# Altium PCB Lab_8_v3.PcbDoc
Units mil, origin at the board's own origin, x right, y up, seen from the top; angles counter-clockwise.
Board outline 3900 x 3900 mil, 2 copper layers (Top Layer, Bottom Layer); 30 components, 25 nets, 115 pads, 23 vias.
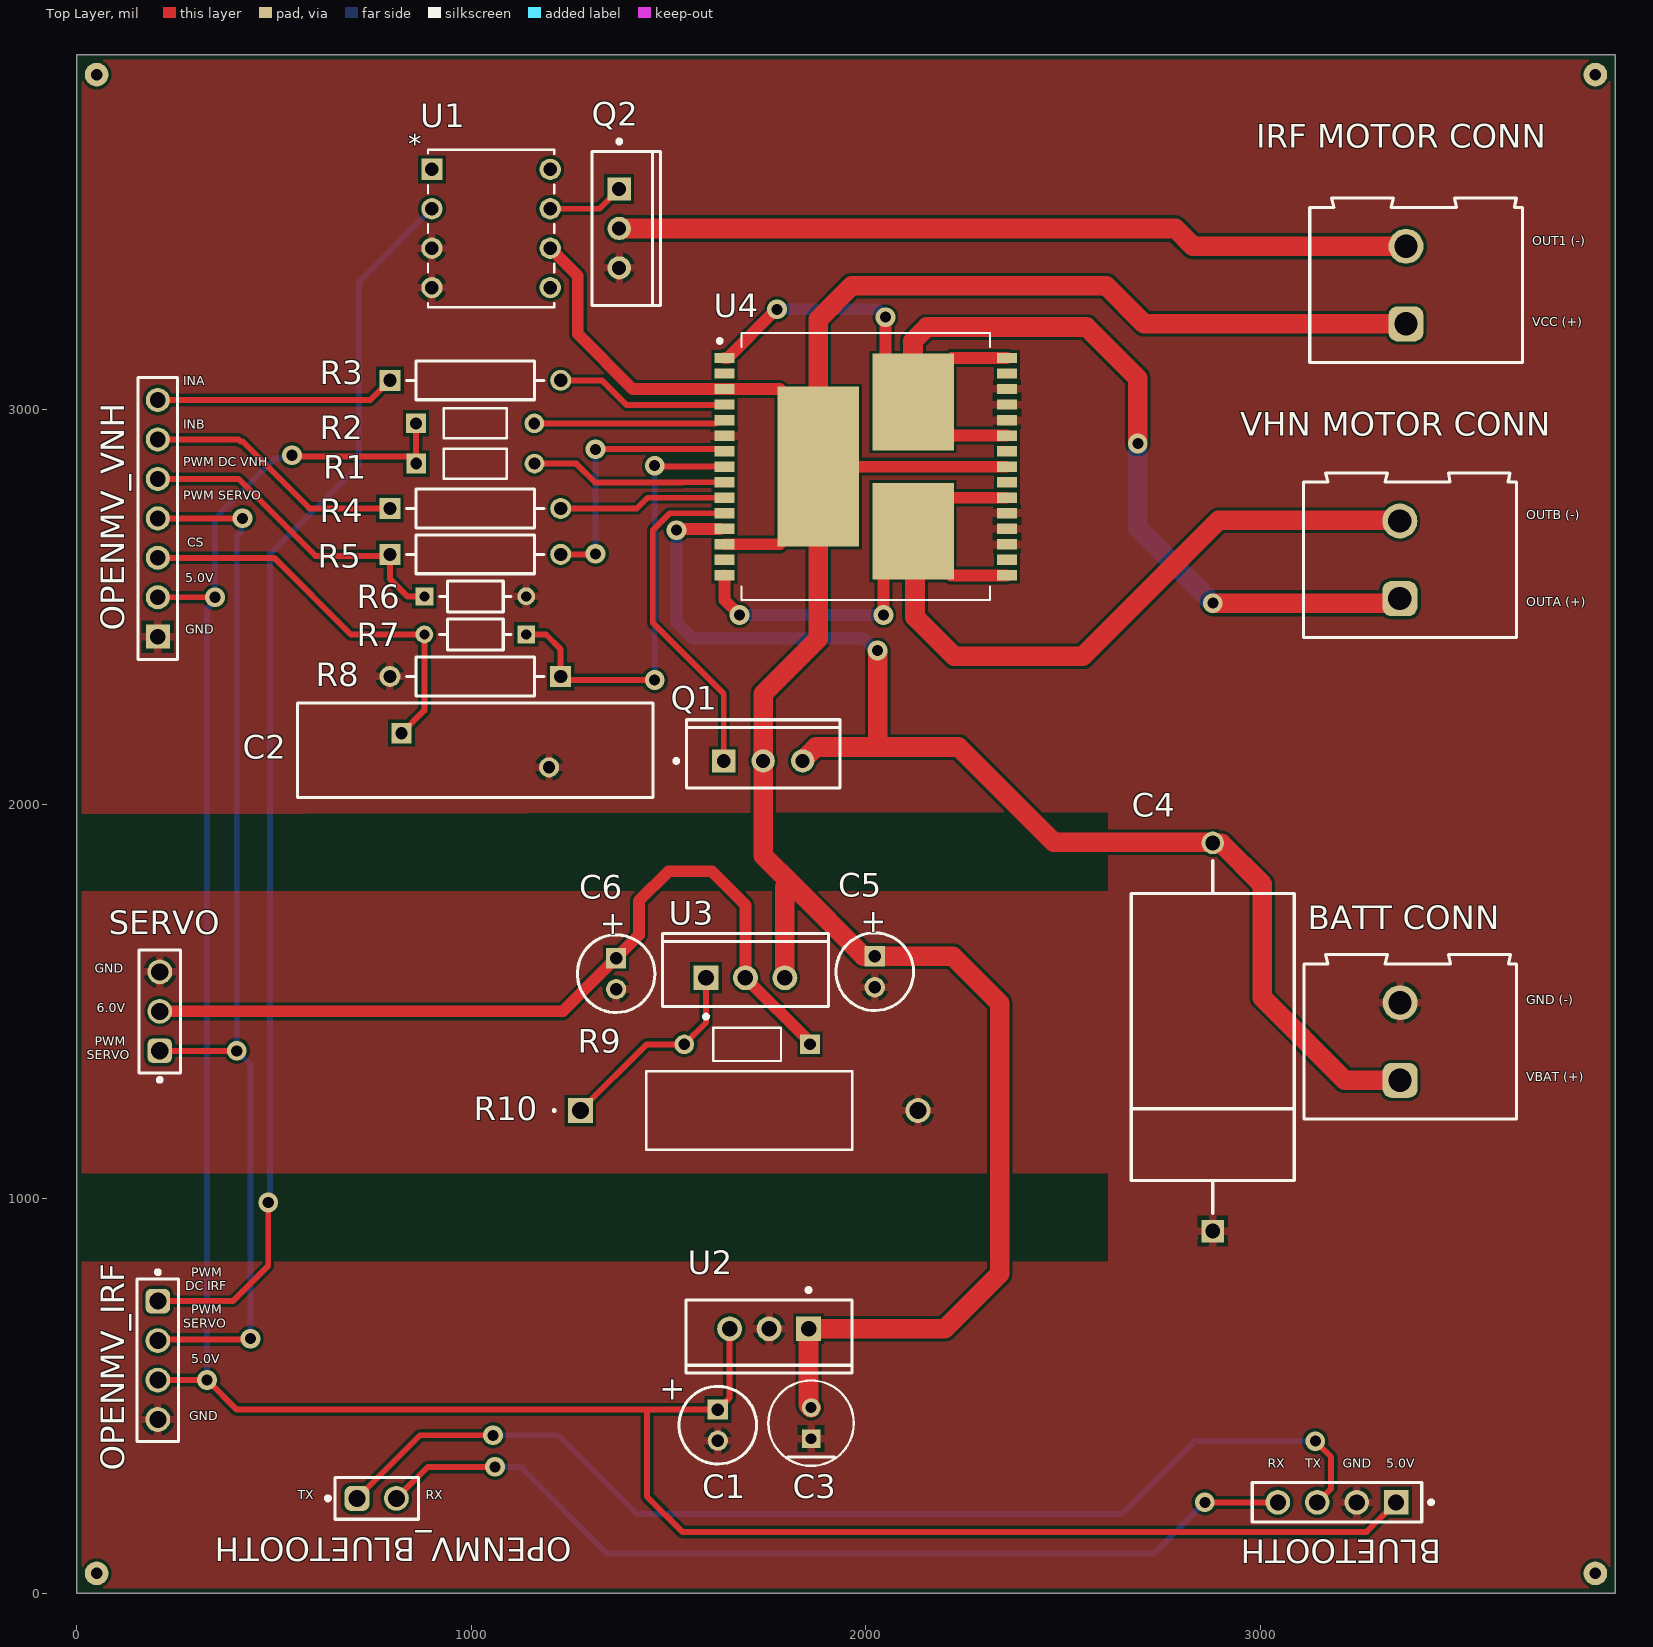
[diagram p0: Top Layer view]
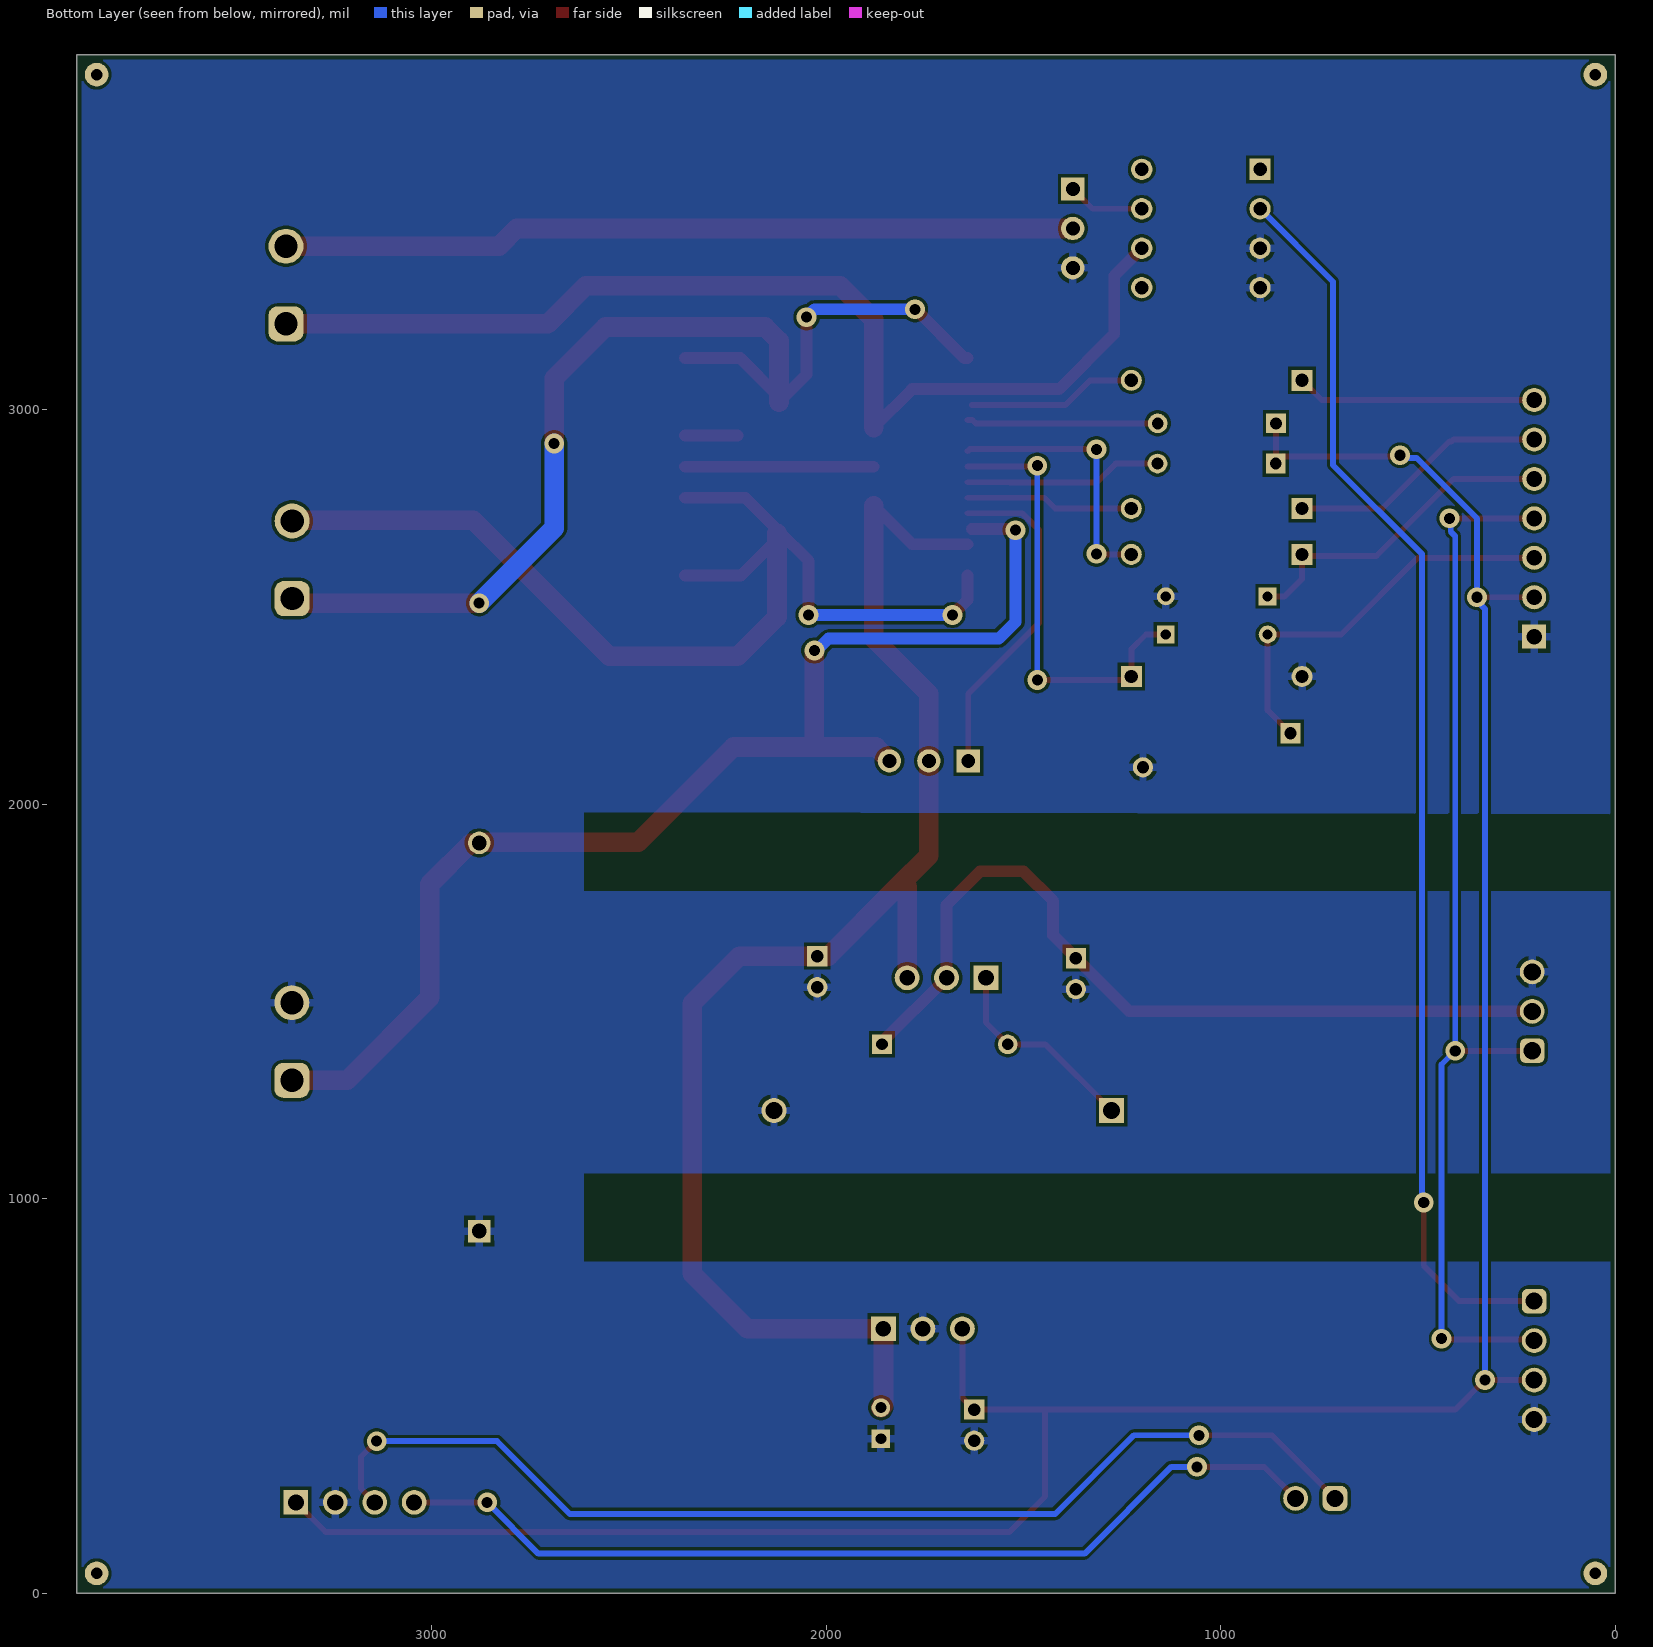
[diagram p1: Bottom Layer view, seen from below]
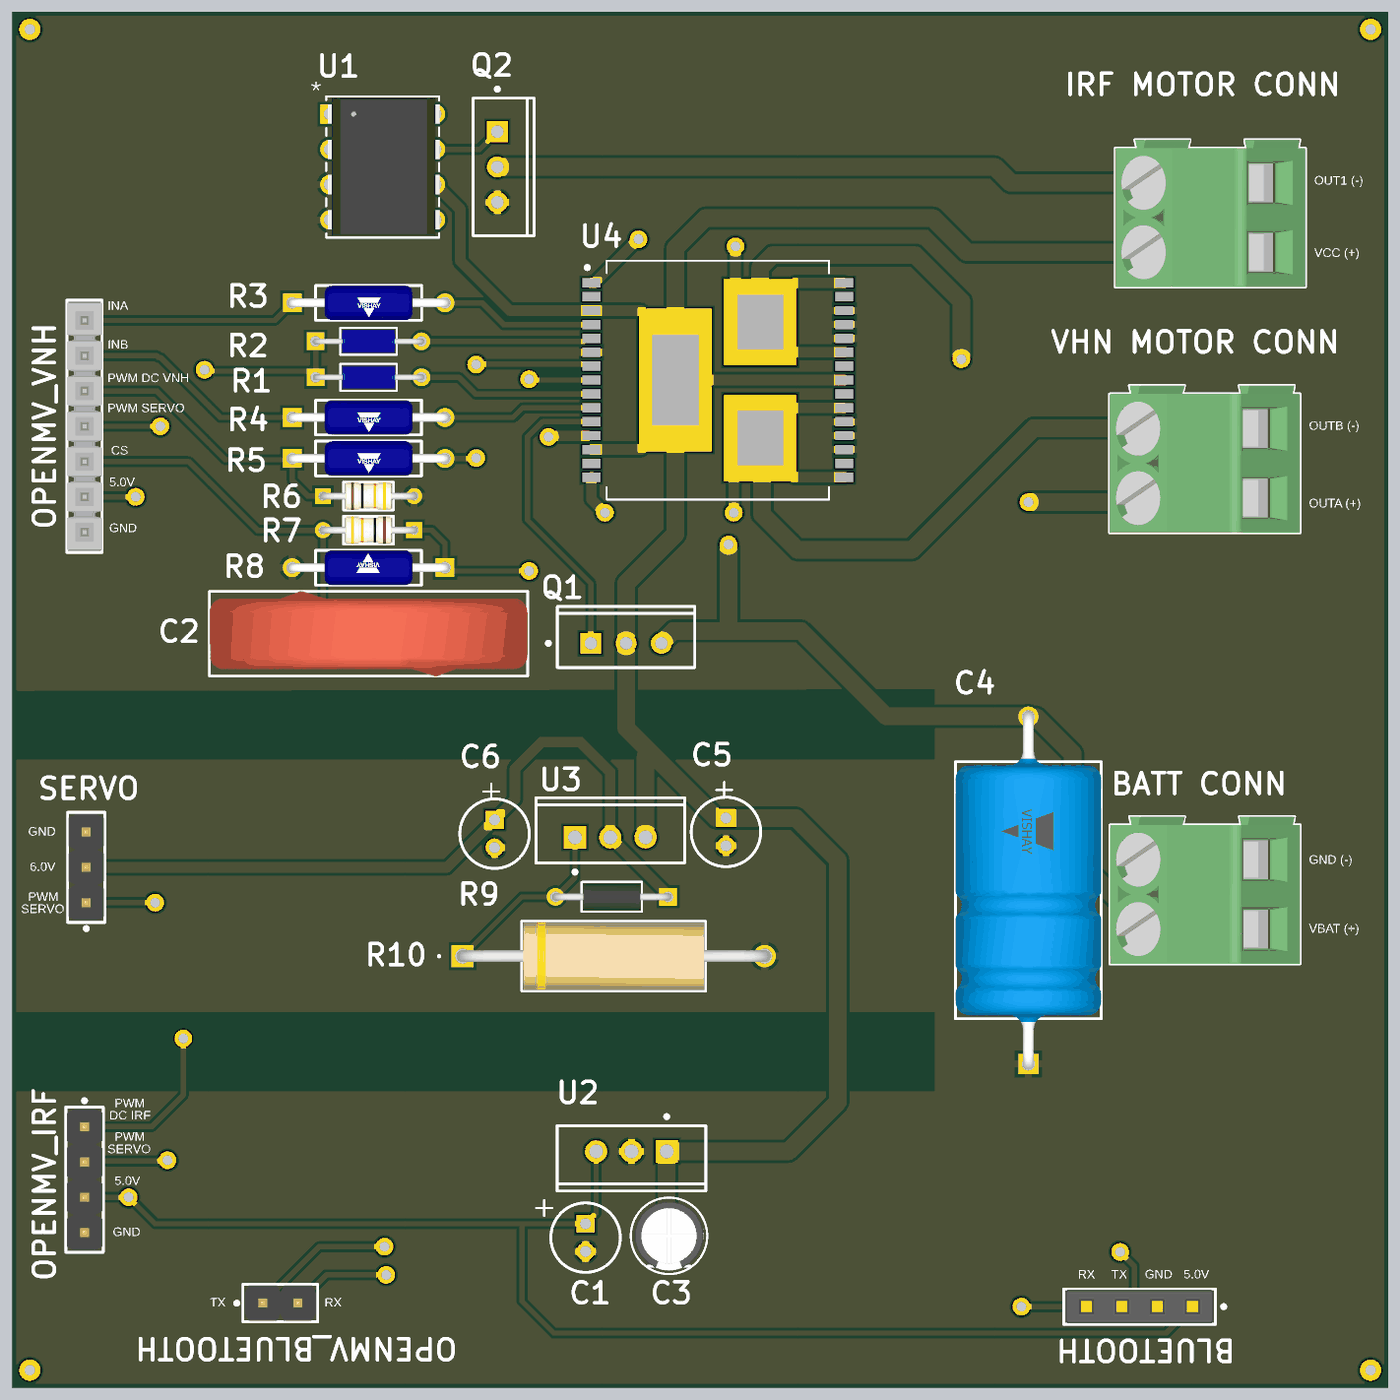
[diagram p2: 3D render of the assembled board from above, using the file's embedded part models]

## Layer stack, top to bottom
Top Solder: solder mask 0.4, Solder Resist, Dk 3.5
Top Layer: signal copper 1.4
Dielectric 1: dielectric 12.6, FR-4, Dk 4.8
Bottom Layer: signal copper 1.4
Bottom Solder: solder mask 0.4, Solder Resist, Dk 3.5

## Board outline
0,0 0,3900 3900,3900 3900,0

## Design rules (kind name [scope] priority, off if disabled: settings)
BoardOutlineClearance [All] p1: gap=11.81 ignorepadtopadclearanceinfootprint=FALSE except(15.75: Arc-SplitBarrior Arc-SplitContinuation Track-SplitBarrior Track-SplitContinuation SMDPad-SplitBarrior SMDPad-SplitContinuation THPad-SplitBarrior THPad-SplitContinuation Via-SplitBarrior Via-SplitContinuation Fill-SplitBarrior Fill-SplitContinuation Poly-SplitBarrior Poly-SplitContinuation Region-SplitBarrior Region-SplitContinuation Text-SplitBarrior Text-SplitContinuation)
Clearance "Clearance Different Nets" [All] p1: gap=7.87 ignorepadtopadclearanceinfootprint=FALSE except(3.5: Arc-Arc Arc-Track Arc-SMDPad Track-Track Track-SMDPad; 5: SMDPad-SMDPad SMDPad-Via THPad-Via Via-Via; 10: Arc-Via Arc-Text Track-Via Track-Text SMDPad-Text THPad-Text Via-Text Fill-Text Poly-Text Region-Text Text-Text; 19.68: THPad-THPad Via-Hole)
Clearance "Clearance Same Nets" [All] p2: gap=7.87 ignorepadtopadclearanceinfootprint=FALSE except(3.5: Arc-Arc Arc-Track Arc-SMDPad Track-Track Track-SMDPad SMDPad-SMDPad; 5: SMDPad-Via THPad-Via; 10: Arc-Via Arc-Text Track-Via Track-Text SMDPad-Text THPad-Text Via-Via Via-Text Fill-Text Poly-Text Region-Text Text-Text)
Clearance "Clearance Bottom Layer" [OnLayer('Bottom Layer')] p3: gap=8 ignorepadtopadclearanceinfootprint=TRUE except(10: Arc-Text Track-Text SMDPad-Text THPad-Text Via-Text Fill-Text Poly-Text Region-Text Text-Text)
Clearance "Clearance Top Layer" [OnLayer('Top Layer')] p4: gap=8 ignorepadtopadclearanceinfootprint=TRUE except(10: Arc-Text Track-Text SMDPad-Text THPad-Text Via-Text Fill-Text Poly-Text Region-Text Text-Text)
HoleSize [All] p1: absolutevalues=TRUE maxlimit=248.03 minlimit=7.87 maxpercent=80.000 minpercent=20.000
MinimumAnnularRing [All] p1: minimumring=5.12
MinimumSolderMaskSliver [All] p1: minsoldermaskwidth=3.94
PolygonConnect PolygonConnect_1 [All] p1: thpad.connectstyle=Relief thpad.reliefconductorwidth=20 thpad.reliefentries=4 thpad.polygonreliefangle="90 Angle" thpad.airgapwidth=10 smdpad.connectstyle=Relief smdpad.reliefconductorwidth=20 smdpad.reliefentries=4 smdpad.polygonreliefangle="90 Angle" smdpad.airgapwidth=10 via.connectstyle=Direct via.reliefconductorwidth=20 via.reliefentries=4 via.polygonreliefangle="90 Angle" via.airgapwidth=10
RoutingCorners [All] p1: cornerstyle=Round minsetback=100 maxsetback=100
RoutingVias [All] p1: holewidth=19.68 width=39.37 viastyle="Through Hole" minholewidth=7.87 minwidth=13.78 maxholewidth=39.37 maxwidth=78.74
SilkToSilkClearance [All] p1: silktosilkclearance=3.94
SilkToSolderMaskClearance [IsPad] p1: minsilkscreentomaskgap=3.94 clearancetoexposedcopper=TRUE
SolderMaskExpansion [All] p1: expansion=4 istentingtop=FALSE
SupplyNets "Schematic Supply Nets" [InNet('GND')] p1: voltage=0.000
Width [All] p1: maxlimit=100 minlimit=3.5 preferedwidth=15
25 further rules are at their usual default settings.

## Components (designator, comment, footprint, x,y, rotation, side; value= is the part's Value field where it differs from the comment)
"BATT CONN" "691211720002" 691211720002 3380.59,1398.42 r90 top
BLUETOOTH "SSW-104-02-G-S" FP-SSW-104-02-G-S-MFG 3195,230 r180 top
C1 "ECA1HM220" CAPPR55-200-1100X500X1200 1625,425.63 r270 top value=22µF
C2 "33nF" FP-565R30GASS33-MFG 1010,2137.01 r0 top
C3 "EEU-EB1JR47S" FP-RAD-TH-D_5_0_5-L_11_1-MFG 1861.49,430.67 r90 top value=470nF
C4 "MAL202136471E3" FP-MAL202136471E3-MFG 2880,1410 r90 top value=470µF
C5 "ECA1HM100" CAPPR55-200-1100X500X1200 2022.91,1575.43 r270 top value=10µF
C6 "ECA1HM100" CAPPR55-200-1100X500X1200 1367.09,1570.42 r270 top value=10µF
"IRF MOTOR CONN" "691211720002" 691211720002 3395.59,3316.57 r90 top
OPENMV_BLUETOOTH "61300211121" 61300211121 760,240 r0 top
OPENMV_IRF "61300411121" 61300411121 205,590 r270 top
OPENMV_VNH "TSW-107-05-G-S" SMTC-TSW-107-05-X-S 205,2425 r90 top
Q1 "IRF3205PBF" INF-PG-TO-220AB 1740,2110 r90 top
Q2 "IRF3205PBF" INF-PG-TO-220AB 1375,3460 r0 top
R1 "RLR05C4701GRB14" ERL05_VIS 860.14,2863.85 r0 top value=4.7k
R2 "RLR05C4701GRB14" ERL05_VIS 859.69,2965.85 r0 top value=4.7k
R3 "1k" FP-RLR07-MFG 1010.12,3075 r0 top
R4 "1k" FP-RLR07-MFG 1010,2750 r0 top
R5 "1k" FP-RLR07-MFG 1010,2633.7 r0 top
R6 "CF18JT10K0" FP-CF18-MFG 1010,2527.24 r0 top value=10k
R7 "CF18JT10K0" FP-CF18-MFG 1010,2430.63 r180 top value=10k
R8 "1k" FP-RLR07-MFG 1010,2324.17 r180 top
R9 "SFR16S0001210FR500" SFR16S_VIS 1858.79,1391.33 r180 top value=121
R10 "AC03000004700JAC00" RES_AC03_VIS 1276.55,1223.43 r0 top value=470
SERVO "61300311121" 61300311121 210,1475 r90 top
U1 "MAX4427CPA+" 21-0043_P8+2_MXM 900,3610 r0 top
U2 "LM2940CT-5.0/NOPB" NDE0003A 1755,670 r180 top
U3 "LM1086CT-ADJ/NOPB" NDE0003A 1695,1560 r0 top
U4 "VNH5019ATR-E" IC_VNH5019ATR-E 1999.92,2856.02 r0 top
"VHN MOTOR CONN" "691211720002" 691211720002 3380,2620 r90 top

## Footprints (in the part's own frame and the unit in brackets; to place one, negate y for a bottom-side part, rotate by r counter-clockwise, add the part's x,y. Pads: shape width x height; smd on the part's side, far side on the other; paste and mask are expansions set on the pad)
21-0043_P8+2_MXM [mil]
  rect 54x54 / inner round 60 / far side rect 54x54 hole 34 paste-99999 mask+0: 1(0,0)
  round 54 / inner round 60 / far side round 54 hole 34 paste-99999 mask+0: 2(0,-100) 3(0,-200) 4(0,-300) 5(300,-300) 6(300,-200) 7(300,-100) 8(300,0)
  silkscreen extent -10,-350 310,50, body extent -6,-345 311,45, height 186
61300211121 [mm] "Pin Header, pitch 2.54 mm, THT, Vertical, single row, 2p"
  rrect50% 1.6x1.6 hole 1.1: 1(-1.27,0)
  round 1.6 hole 1.1: 2(1.27,0)
  silkscreen extent -3.26,-1.35 2.69,1.35, body extent -2.54,-1.27 2.54,1.27, height 8.57
61300311121 [mm] "Pin Header, pitch 2.54 mm, THT, Vertical, single row, 3p"
  rrect50% 1.6x1.6 hole 1.1: 1(-2.54,0)
  round 1.6 hole 1.1: 2(0,0) 3(2.54,0)
  silkscreen extent -4.53,-1.35 3.96,1.35, body extent -3.81,-1.27 3.81,1.27, height 8.57
61300411121 [mm] "Pin Header, pitch 2.54 mm, THT, Vertical, single row, 4p"
  rrect50% 1.6x1.6 hole 1.1: 1(-3.81,0)
  round 1.6 hole 1.1: 2(-1.27,0) 3(1.27,0) 4(3.81,0)
  silkscreen extent -5.8,-1.35 5.23,1.35, body extent -5.08,-1.27 5.08,1.27, height 8.57
691211720002 [mm] "5,00mm - modular - green -45¡ã entry with rising cage clamp - 02p"
  rrect50% 2.25x2.25 hole 1.5: 1(-2.5,0.65)
  round 2.25 hole 1.5: 2(2.5,0.65)
  silkscreen extent -5,-6.85 5.6,6.85, body extent -5,-6.85 5.6,6.85, height 15.72
CAPPR55-200-1100X500X1200 [mm] "THD, 2-Leads, Dia 5mm, Pin Spacing 2mm"
  rect 1.3x1.3 hole 0.8: 1(-1,0)
  round 1.3 hole 0.8: 2(1,0)
  silkscreen extent -2.5,-2.5 2.5,2.5, body extent -2.5,-2.5 2.45,2.5, height 12
ERL05_VIS [mil]
  rect 50x50 / inner round 60 / far side rect 50x50 hole 30 paste-99999 mask+0: 1(0,0)
  round 50 / inner round 60 / far side round 50 hole 30 paste-99999 mask+0: 2(300,0)
  silkscreen extent 70,-38 230,38, body extent -8,-33 308,33, height 66
FP-565R30GASS33-MFG [mm]
  rect 1.3x1.3 hole 0.8 paste-2539.97 mask+0: 1(-4.75,1.1)
  round 1.3 hole 0.8 paste-2539.97 mask+0: 2(4.75,-1.1)
  silkscreen extent -11.45,-3.05 11.45,3.05, body extent -11.55,-3.15 11.55,3.15, height 0.25
FP-CF18-MFG [mm]
  rect 1.15x1.15 hole 0.65 paste-2539.97 mask+0: 1(-3.28,0)
  round 1.15 hole 0.65 paste-2539.97 mask+0: 2(3.28,0)
  silkscreen extent -2.3,-1 2.3,1, body extent -3.96,-1.1 3.96,1.1, height 0.25
FP-MAL202136471E3-MFG [mm]
  rect 1.45x1.45 hole 0.95 paste-2539.97 mask+0: 1(-12.5,0)
  round 1.45 hole 0.95 paste-2539.97 mask+0: 2(12.5,0)
  silkscreen extent -11.37,-5.25 11.37,5.25, body extent -13.33,-5.35 13.33,5.35, height 0.25
FP-RAD-TH-D_5_0_5-L_11_1-MFG [mm]
  rect 1.2x1.2 hole 0.7 paste-2539.97 mask+0: 1(-1,0)
  round 1.2 hole 0.7 paste-2539.97 mask+0: 2(1,0)
  silkscreen extent -2.75,-2.75 2.75,2.75, body extent -2.85,-2.85 2.85,2.85, height 0.25
FP-RLR07-MFG [mm]
  rect 1.35x1.35 hole 0.85 paste-2539.97 mask+0: 1(-5.5,0)
  round 1.35 hole 0.85 paste-2539.97 mask+0: 2(5.5,0)
  silkscreen extent -4.43,-1.25 4.43,1.25, body extent -6.27,-1.35 6.27,1.35, height 0.25
FP-SSW-104-02-G-S-MFG [mm]
  rect 1.59x1.59 hole 1.04 paste-2539.97 mask+0: 1(-3.81,0)
  round 1.59 hole 1.04 paste-2539.97 mask+0: 2(-1.27,0) 3(1.27,0) 4(3.81,0)
  silkscreen extent -6.19,-1.27 5.46,1.27, body extent -5.56,-1.37 5.56,1.37, height 0.25
IC_VNH5019ATR-E [mm]
  rect 1.3x0.665 smd: 1(-9.1,7) 2(-9.1,6) 3(-9.1,5) 4(-9.1,4) 5(-9.1,3) 6(-9.1,2) 7(-9.1,1) 8(-9.1,0) 9(-9.1,-1) 10(-9.1,-2) 11(-9.1,-3) 12(-9.1,-4) 13(-9.1,-5) 14(-9.1,-6) 15(-9.1,-7) 16(9.1,-7) 17(9.1,-6) 18(9.1,-5) 19(9.1,-4) 20(9.1,-3) 21(9.1,-2) 22(9.1,-1) 23(9.1,0) 24(9.1,1) 25(9.1,2) 26(9.1,3) 27(9.1,4) 28(9.1,5) 29(9.1,6) 30(9.1,7)
  rect 5.25x10.3 smd paste-6: HS1(-3.05,0)
  rect 5.25x6.23 smd paste-4: HS2(3.05,4.165) HS3(3.05,-4.165)
  silkscreen extent -9.5,-8.6 8,8.6
INF-PG-TO-220AB [mm] "FM, 3-Leads, Body 9.9x4.4mm, Pitch 2.54mm"
  rect 1.5x1.5 hole 0.9: 1(0,2.54)
  round 1.5 hole 0.9: 2(0,0) 3(0,-2.54)
  silkscreen extent -1.75,-4.95 2.65,5.72, body extent -1.75,-4.95 2.65,4.95, height 20.2
NDE0003A [mm] "FM, 3-Leads, Body 10.7x4.7mm, Pitch 2.54mm"
  rect 1.6x1.6 hole 1: 1(-2.54,0)
  round 1.6 hole 1: 2(0,0) 3(2.54,0)
  silkscreen extent -5.35,-2.62 5.35,2.85, body extent -5.4,-1.9 5.4,2.9, height 19.4
RES_AC03_VIS [mil]
  rect 63x63 / inner round 60 / far side rect 63x63 hole 43 paste-99999 mask+0: 1(0,0)
  round 63 / inner round 60 / far side round 63 hole 43 paste-99999 mask+0: 2(856,0)
  silkscreen extent -69,-100 689,100, body extent -16,-95 873,95, height 189
SFR16S_VIS [mil]
  rect 49.69x49.69 / inner round 60 / far side rect 49.69x49.69 hole 30 paste-99999 mask+0: 1(0,0)
  round 49.69 / inner round 60 / far side round 49.69 hole 30 paste-99999 mask+0: 2(318.9,0)
  silkscreen extent 74,-42 245,42, body extent -10,-37 329,37, height 75
SMTC-TSW-107-05-X-S [mm] ".025 SQ Post Terminal Strip Assembly, 1x7 Pins, Vertical, 2.54mm Pitch, Male"
  rect 1.55x1.55 hole 1.02: 1(0,0)
  round 1.55 hole 1.02: 2(2.54,0) 3(5.08,0) 4(7.62,0) 5(10.16,0) 6(12.7,0) 7(15.24,0)
  silkscreen extent -1.46,-1.27 16.7,1.27, body extent -1.27,-1.27 16.51,1.27, height 5.21

## Part data
"BATT CONN" "IRF MOTOR CONN": library part CMP-1502-02524-2, Color=Green, Current=10A, Max Operating Temperature=105°C, Min Operating Temperature=-40°C, Voltage=300V, Connector Type="PCB, Terminal Block", Contact Material=Brass, Contact Plating=Tin, Height=15.5mm, Housing Material=Nylon, Lead Pitch=5mm, Length=13.7mm, Mount="Through Hole", NexarPartId=8917714, Number of Contacts=2, Number of Levels=1, Number of Pins=2, Number of Positions Per Level=2, Packaging=Box, Pitch=5.0038mm, Plating="Brass, Steel", REACH SVHC=Unknown, RoHS=Compliant, Stripping Length=-7mm, Termination=Screw, Width=10mm, Wire Gauge (Max)=24AWG, Wire Gauge (Min)=12AWG, Wire/Cable Gauge=12AWG
BLUETOOTH: library part CMP-002-00079-1, "Board Connector, 4 Contact(s), 1 Row(s), Female, Straight, 0.1 inch Pitch, Solder Terminal, Locking, Socket", Flammability Rating="UL94 V-0", Manufacturer Series=SSW-1, Additional Feature="TIGER BUY CONTACT", Body Breadth=0.095inch, Body Length=0.42inch, Body/Shell Style=SOCKET, Connector Type="BOARD CONNECTOR", Contact Finish - Mating="GOLD (20) OVER NICKEL (50)", Contact Finish - Termination="Gold (Au) - with Nickel (Ni) barrier", Contact Gender=Female, Contact Material=Bronze, Contact Pattern=RECTANGULAR, Contact Style="SQ PIN-SKT", DIN Conformance=No, Filter Feature=No, IEC Conformance=No, Insulation Material=Polymer, JESD-609 Code=e4, Mating Contact Pitch=0.1inch, Mating Information="MULTIPLE MATING PARTS AVAILABLE", MIL Conformance=No, Mixed Contacts=No, Mounting Option 1=LOCKING, Mounting Style=STRAIGHT, Mounting Technology=Board, Number Of Connectors=1, Number of Contacts=4, Number Of PCB Rows=1, Number of Rows Loaded=1, Option="General Purpose", PCB Contact Pattern=RECTANGULAR, Plating Thickness=20uin, Reach SVHC Compliant=Yes, Reference Standard=UL, Reliability=COMMERCIAL, RoHS Compliant=Yes, Terminal Pitch=2.54mm, Termination=Solder
C1: library part CMP-001-00027-7, "Aluminum Electrolytic Capacitor, 22 uF, +/- 20%, 50 V, -40 to 85 degC, 2-Pin THD, RoHS, Bulk", Capacitor Type=Electrolytic, Case/Package=Radial, Manufacturer=Panasonic, Max Operating Temperature=85°C, Min Operating Temperature=-40°C, Package Description="2-Pin Radial Lead, Dia 5 mm, Height 12 mm", Package Quantity=200, Package Reference=CAPPR55-200-1100X500X1200, Ripple Current=100mA, Tolerance=20%, Voltage Rating=50V, Datasheet URL=https://industrial.panasonic.com/cdbs/www-data/pdf/RDF0000/ABA0000C1218.pdf, Datasheet Version="Rev. 05, 10/2016", Diameter=5mm, Lead Pitch=2mm, Manufacturer URL=http://www.panasonic.com/, Mounting Technology=TH, Packaging=Bulk, Pins=2, Ripple Current (AC)=100mA, RoHS Compliant=True
C2: library part CMP-00030-41968055-1, "565R30GASS33 33nF 3 kV dc Ceramic Single Layer Capacitor; Z5U Dielectric Radial 565R Series", Case/Package=Radial, Dielectric=Z5U, Max Operating Temperature=105°C, Min Operating Temperature=-25°C, Tolerance=20%, Voltage=3kV, Capacitance=33nF, Composition=Ceramic, Depth=6.1mm, Diameter=22.9mm, Height=22.9mm, Lead Diameter=640µm, Lead Free="Lead Free", Lead Pitch=9.52mm, Material=Ceramic, Mount=Radial, NexarPartId=41968055, Packaging=Bulk, RoHS=Compliant, Schedule B=8532230060, Termination=Radial, Voltage Rating=3kV, Voltage Rating (DC)=3kV
C3: library part CMP-001-00093-1, "Aluminum Electrolytic Capacitor, Polarized, Aluminum (wet), 63V, 20% +Tol, 20% -Tol, 0.47uF, Through Hole Mount", Capacitor Type=Aluminium, Leakage Current=3uA, Manufacturer Series=EB, Max Operating Temperature=105°C, Min Operating Temperature=-40°C, Package Shape=Cylindrical, Package Style=RadialMeter, Rated DC Voltage (URdc)=63V, Ripple Current=4.5mA, Tolerance  (fill in as +-)=20%, Diameter=5mm, Dielectric Material=Aluminium, JESD-609 Code=e3, Length=11mm, Mounting Technology="Through Hole", Packaging=Bulk, Pins=2, Polarity=Polarized, Reach SVHC Compliant=Yes, RoHS Compliant=Yes, Series=EEU-EB, Tan Delta=0.12, Terminal Finish=Tin, Terminal Pitch=2mm, Termination=Wire, Tolerance (fill in as +-)=20%
C4: library part CMP-001-00083-2, "Aluminum Electrolytic Capacitor, Polarized, Aluminum (wet), 25V, 20% +Tol, 20% -Tol, 470uF, Through Hole Mount", Capacitor Type=Aluminium, ESR (Equivalent Series Resistance)=480mR, Leakage Current=28uA, Max Operating Temperature=85°C, Min Operating Temperature=-40°C, Package Shape=Tubular, Package Style=AxialMeter, Rated DC Voltage (URdc)=25V, Ripple Current=450mA, Tolerance  (fill in as +-)=20%, Diameter=10mm, Dielectric Material=Aluminium, JESD-609 Code=e3, Length=18mm, Mounting Technology="Through Hole", Packaging="Ammo Pack", Pins=2, Polarity=Polarized, Reach SVHC Compliant=Yes, RoHS Compliant=Yes, Tan Delta=0.14, Terminal Finish=Tin, Termination=Wire, Tolerance (fill in as +-)=20%
C5 C6: library part CMP-001-00025-7, "Aluminum Electrolytic Capacitor, 10 uF, +/- 20%, 50 V, -40 to 85 degC, 2-Pin THD, RoHS, Bulk", Capacitor Type=Electrolytic, Case/Package=Radial, Manufacturer=Panasonic, Max Operating Temperature=85°C, Min Operating Temperature=-40°C, Package Description="2-Pin Radial Lead, Dia 5 mm, Height 12 mm", Package Quantity=200, Package Reference=CAPPR55-200-1100X500X1200, Ripple Current=65mA, Tolerance=20%, Voltage Rating=50V, Datasheet URL=https://industrial.panasonic.com/cdbs/www-data/pdf/RDF0000/ABA0000C1218.pdf, Datasheet Version="Rev. 05, 10/2016", Diameter=5mm, Lead Pitch=2mm, Manufacturer URL=http://www.panasonic.com/, Mounting Technology=TH, Packaging=Bulk, Pins=2, Ripple Current (AC)=65mA, RoHS Compliant=True
OPENMV_BLUETOOTH: library part CMP-002-00073-1, "Board Connector, 2 Contact(s), 1 Row(s), Male, Straight, 0.1 inch Pitch, Solder Terminal, Locking, Black Insulator, Plug", Contact Resistance=20mR, Dielectric Withstanding Voltage (AC)=500V, Flammability Rating="UL94 V-0", Insulation Color=Black, Insulation Resistance=1GR, Max Operating Temperature=125°C, Min Operating Temperature=-40°C, Rated Current (Signal)=3A, Body Breadth=0.1inch, Body Depth=0.1inch, Body Length=0.2inch, Body/Shell Style=PLUG, Connector Type="BOARD CONNECTOR", Contact Finish - Mating=GOLD, Contact Finish - Termination="Gold (Au) - with Nickel (Ni) barrier", Contact Gender=Male, Contact Material="Copper Alloy", Contact Pattern=RECTANGULAR, Contact Style="SQ PIN-SKT", DIN Conformance=No, Filter Feature=No, IEC Conformance=No, Insulation Material=Polybutylene, JESD-609 Code=e4, Mating Contact Pitch=0.1inch, MIL Conformance=No, Mixed Contacts=No, Mounting Option 1=LOCKING, Mounting Style=STRAIGHT, Mounting Technology=Board, Number Of Connectors=1, Number of Contacts=2, Number of Rows Loaded=1, Option="General Purpose", PCB Contact Pattern=RECTANGULAR, Reach SVHC Compliant=Yes, Reference Standard=UL, Reliability=COMMERCIAL, RoHS Compliant=Yes, Terminal Length=0.118inch, Terminal Pitch=2.54mm, Termination=Solder
OPENMV_IRF: library part CMP-00009-2, "Board Connector, 4 Contact(s), 1 Row(s), Male, Straight, 0.1 inch Pitch, Solder Terminal, Locking, Black Insulator, Plug", Contact Resistance=20mR, Dielectric Withstanding Voltage (AC)=500V, Insulation Color=Black, Insulation Resistance=1GR, Max Operating Temperature=125°C, Min Operating Temperature=-40°C, Rated Current (Signal)=3A, Body Breadth=0.1inch, Body Depth=0.1inch, Body Length=0.4inch, Body/Shell Style=PLUG, Connector Type="BOARD CONNECTOR", Contact Finish - Mating=GOLD, Contact Finish - Termination="Gold (Au) - with Nickel (Ni) barrier", Contact Gender=Male, Contact Material="Copper Alloy", Contact Pattern=RECTANGULAR, Contact Style="SQ PIN-SKT", Insulation Material=Polybutylene, JESD-609 Code=e4, Mating Contact Pitch=0.1inch, Mounting Option 1=LOCKING, Mounting Style=STRAIGHT, Mounting Technology=Board, Number Of Connectors=1, Number of Contacts=4, Number of Rows Loaded=1, PCB Contact Pattern=RECTANGULAR, Reach SVHC Compliant=Yes, Reference Standard=UL, Reliability=COMMERCIAL, RoHS Compliant=Yes, Terminal Length=0.118inch, Terminal Pitch=2.54mm, Termination=Solder
OPENMV_VNH: library part CMP-002-00080-1, "Board Connector, 7 Contact(s), 1 Row(s), Male, Straight, 0.1 inch Pitch, Solder Terminal, Black Insulator", Flammability Rating="UL94 V-0", Insulation Color=Black, Additional Feature=E.L.P., Body Breadth=0.1inch, Body Depth=0.1inch, Connector Type="BOARD CONNECTOR", Contact Finish - Mating="GOLD (10) OVER NICKEL (50)", Contact Finish - Termination="Gold (Au) - with Nickel (Ni) barrier", Contact Gender=Male, Contact Material=Bronze, Contact Pattern=RECTANGULAR, Contact Style="SQ PIN-SKT", DIN Conformance=No, Filter Feature=No, IEC Conformance=No, Insulation Material=Polybutylene, JESD-609 Code=e4, Mating Contact Pitch=0.1inch, Mating Information="MULTIPLE MATING PARTS AVAILABLE", MIL Conformance=No, Mixed Contacts=No, Mounting Style=STRAIGHT, Mounting Technology=Board, Number Of Connectors=1, Number of Contacts=7, Number Of PCB Rows=1, Number of Rows Loaded=1, Option="General Purpose", PCB Contact Pattern=RECTANGULAR, Plating Thickness=10uin, Reach SVHC Compliant=Yes, Reference Standard=UL, Reliability=COMMERCIAL, RoHS Compliant=Yes, Terminal Length=0.13inch, Terminal Pitch=2.54mm, Termination=Solder
Q1 Q2: library part CMP-00000-1, "Power Field-Effect Transistor, 75A I(D), 55V, 0.008ohm, 1-Element, N-Channel, Silicon, Metal-oxide Semiconductor FET, TO-220AB", Avalanche Energy Rating (Eas)=264mJ, Case Connection=DRAIN, Drain Current-Max (Abs) (ID)=110A, Drain Current-Max (ID)=75A, Drain-source On Resistance-Max=8mR, DS Breakdown Voltage-Min=55V, Max Operating Temperature=175°C, Operating Mode="ENHANCEMENT MODE", Package Body Material=Plastic, Package Shape=Rectangular, Package Style="FLANGE MOUNTMeter", Peak Reflow Temperature (Cel)=250°C, Power Dissipation-Max (Abs)=200W, Pulsed Drain Current-Max (IDM)=390A, Time @ Peak Reflow Temperature-Max (s)=30s, FET Technology="METAL-OXIDE SEMICONDUCTOR", JEDEC-95 Code=TO-220AB, JESD-30 Code=R-PSFM-T3, JESD-609 Code=e3, Number of Elements=1, Pins=3, Polarity/Channel Type=N-CHANNEL, Qualification Status="Not Qualified", RoHS Compliant=Yes, Surface Mount=No, Terminal Finish=Nickel, Terminal Form="Through Hole", Terminal Position=SINGLE, Transistor Application=SWITCHING, Transistor Element Material=SILICON
R1 R2: library part CMP-009-00185-6, "Fixed Resistor, Metal Film, 0.125W, 4700ohm, 200V, 2% +/-Tol, 100ppm/Cel, Through Hole Mount", Max Operating Temperature=150°C, Mfr_Name=Vishay, Min Operating Temperature=-65°C, Package Length=3.81mm, Package Shape=Tubular, Package Style=AXIAL, Power=125mW, Rated Temperature=70°C, Resistor Type="FIXED RESISTOR", Temperature Coefficient (ppm/Cel)=100, Tolerance=2%, Working Voltage=200V, Construction=Tubular, Design Item ID=RLR05C4701GRB14, JESD-609 Code=e0, Lead Diameter=0.41mm, Lead Length=31.75mm, Mounting Technology="Through Hole", Packaging=Bulk, Pins=2, Reach SVHC Compliant=No, Reference Standard=MIL-PRF-39017, RoHS Compliant=No, Source=RLR05C4701GRB14.SchLib, Technology="METAL FILM", Terminal Finish=Tin, Termination=Wire
R3 R4 R5 R8: library part CMP-00030-39447724-1, "RLR07C1001FSB14 Fixed Resistor, Metal Film, 0.25W, 1000ohm, 250V, 1% +/-Tol, 100ppm/Cel, Through Hole Mount", Case/Package=Conformal, Max Operating Temperature=150°C, Max Power Dissipation=250mW, Min Operating Temperature=-65°C, Resistance=1kΩ, Temperature Coefficient=100ppm/°C, Tolerance=1%, Voltage Rating=250V, Composition="Metal Film", Contact Plating="Lead, Tin", Diameter=2.29mm, Failure Rate=0.001%, Features="Military, Moisture Resistant, Weldable", Lead Diameter=640µm, Lead Free="Contains Lead", Lead Length=38.1mm, Length=7.62mm, Military Standard=MIL-PRF-39017, NexarPartId=39447724, Number of Pins=14, Number of Terminations=2, Packaging=Bulk, Power Rating=250mW, Radiation Hardening=No, REACH SVHC=Unknown, RoHS=Non-Compliant, Schedule B="8533210090, 8533210090", Termination=Axial, Voltage Rating (DC)=250V, Width=2.29mm, Wire/Cable Diameter=50.8µm
R6 R7: library part CMP-00016-1, "Fixed Resistor, Carbon Film, 0.125W, 10000ohm, 250V, 5% +/-Tol, -500,0ppm/Cel, Through Hole Mount", Max Operating Temperature=155°C, Min Operating Temperature=-55°C, Package Length=3.3mm, Package Shape=Tubular, Package Style=AXIAL, Power=125mW, Rated Temperature=70°C, Resistor Type="FIXED RESISTOR", Temperature Coefficient (ppm/Cel)=500, Tolerance=5%, Working Voltage=250V, Construction=Tubular, JESD-609 Code=e3, Lead Diameter=0.4mm, Lead Length=28mm, Mounting Technology="Through Hole", Packaging="Tape and Reel", Pins=2, Reach SVHC Compliant=Yes, RoHS Compliant=Yes, Technology="CARBON FILM", Terminal Finish=Tin, Termination=Wire
R9: library part CMP-009-00182-5, "Fixed Resistor, Metal Film, 0.5W, 121ohm, 200V, 1% +/-Tol, 100ppm/Cel, Through Hole Mount", Max Operating Temperature=155°C, Mfr_Name=Vishay, Min Operating Temperature=-55°C, Package Length=3.5mm, Package Shape=Tubular, Package Style=AXIAL, Power=500mW, Rated Temperature=70°C, Resistor Type="FIXED RESISTOR", Temperature Coefficient (ppm/Cel)=100, Tolerance=1%, Voltage Rating=200V, Construction=Tubular, Design Item ID=SFR16S0001210FR500, JESD-609 Code=e3, Lead Diameter=0.45mm, Mounting Technology="Through Hole", Packaging="Tape and Reel", Pins=2, Reach SVHC Compliant=Yes, RoHS Compliant=Yes, Source=SFR16S0001210FR500.SchLib, Technology="METAL FILM", Terminal Finish=Tin, Termination=Wire, Working Voltage=200V
R10: library part CMP-009-00184-1, "Fixed Resistor, Wire Wound, 3W, 470ohm, 37.55V, 5% +/-Tol, 100,180ppm/Cel, Through Hole Mount", Max Operating Temperature=250°C, Min Operating Temperature=-55°C, Package Length=13mm, Package Shape=Tubular, Package Style=AXIAL, Power=3W, Rated Temperature=40°C, Resistor Type="FIXED RESISTOR", Temperature Coefficient (ppm/Cel)=180, Tolerance=5%, Additional Feature="FLAME PROOF", Construction=Tubular, JESD-609 Code=e3, Lead Diameter=0.8mm, Mounting Technology="Through Hole", Packaging="Ammo Pack", Pins=2, Reach SVHC Compliant=Yes, RoHS Compliant=Yes, Technology="WIRE WOUND", Terminal Finish=Tin, Termination=Wire
SERVO: library part CMP-00010-2, "Board Connector, 3 Contact(s), 1 Row(s), Male, Straight, 0.1 inch Pitch, Solder Terminal, Locking, Black Insulator, Plug", Contact Resistance=20mR, Dielectric Withstanding Voltage (AC)=500V, Insulation Color=Black, Insulation Resistance=1GR, Max Operating Temperature=125°C, Min Operating Temperature=-40°C, Rated Current (Signal)=3A, Body Breadth=0.1inch, Body Depth=0.1inch, Body Length=0.3inch, Body/Shell Style=PLUG, Connector Type="BOARD CONNECTOR", Contact Finish - Mating=GOLD, Contact Finish - Termination="Gold (Au) - with Nickel (Ni) barrier", Contact Gender=Male, Contact Material="Copper Alloy", Contact Pattern=RECTANGULAR, Contact Style="SQ PIN-SKT", Insulation Material=Polybutylene, JESD-609 Code=e4, Mating Contact Pitch=0.1inch, Mounting Option 1=LOCKING, Mounting Style=STRAIGHT, Mounting Technology=Board, Number Of Connectors=1, Number of Contacts=3, Number of Rows Loaded=1, PCB Contact Pattern=RECTANGULAR, Reach SVHC Compliant=Yes, Reference Standard=UL, Reliability=COMMERCIAL, RoHS Compliant=Yes, Terminal Length=0.118inch, Terminal Pitch=2.54mm, Termination=Solder
U1: library part CMP-003-000001-1, "No Description Available", Mfr_Name="Analog Devices Inc", Design Item ID=MAX4427CPA+, RefDes=RefDes, Source=MAX4427CPA&plus_.SchLib, Type=Type
U2: library part CMP-00005-1, "Fixed Positive LDO Regulator, 5V, 1V Dropout, BIPolar, PSFM3", Dropout Voltage1-Max=1V, Dropout Voltage1-Nom=500mV, Input Voltage Absolute-Max=45V, Max Operating Temperature=125°C, Max Supply Voltage=26V, Min Input Voltage=6.25V, Min Operating Temperature=-40°C, Operating Temperature, TJ-Min=0°C, Output Current1-Max=1A, Output Voltage1-Max=5.25V, Output Voltage1-Min=4.75V, Output Voltage1-Nom=5V, Package Body Material=Plastic, Package Equivalence Code=SIP3,.1TB, Package Shape=Rectangular, Peak Reflow Temperature (Cel)=260°C, Time @ Peak Reflow Temperature-Max (s)=40s, Voltage Tolerance-Max=5%, Adjustability=FIXED, Channels=1, JESD-30 Code=R-PSFM-T3, JESD-609 Code=e3, Moisture Sensitivity Level=1, Number of Outputs=1, Operating Temperature, TJ-Max=125°C, Pins=3, Qualification Status="Not Qualified", Reach SVHC Compliant=Yes, Regulator Type="FIXED POSITIVE SINGLE OUTPUT LDO REGULATOR", RoHS Compliant=Yes, Surface Mount=No, Technology=BIPOLAR, Terminal Finish=Tin, Terminal Form="Through Hole", Terminal Pitch=2.54mm, Terminal Position=SINGLE
U3: library part CMP-00006-1, "Adjustable Positive LDO Regulator, 1.2V Min, 15V Max, 1.5V Dropout, BIPolar, PSFM3", Case/Package=TO-220, Dropout Voltage1-Max=1.5V, Dropout Voltage1-Nom=1.3V, Input-Output Voltage Differential-Max=15V, Operating Temperature, TJ-Max=125°C, Operating Temperature, TJ-Min=0°C, Output Current1-Max=1.5A, Output Voltage1-Min=1.2V, Package Body Material=Plastic, Package Equivalence Code=SIP3,.1TB, Package Shape=Rectangular, Package Style="FLANGE MOUNTMeter", Adjustability=ADJUSTABLE, Channels=1, Input-Output Voltage Differential-Min=1.5V, JESD-30 Code=R-PSFM-T3, JESD-609 Code=e3, Line Regulation-Max (%/V)=0.01, Load Regulation-Max(%)=0.4%, Moisture Sensitivity Level=1, Number of Outputs=1, Output Voltage1-Max=15V, Packaging=Rail/Tube, Pins=3, Qualification Status="Not Qualified", Reach SVHC Compliant=Yes, Regulator Type="ADJUSTABLE POSITIVE SINGLE OUTPUT LDO REGULATOR", RoHS Compliant=Yes, Surface Mount=No, Technology=BIPOLAR, Terminal Finish=Tin, Terminal Form="Through Hole", Terminal Pitch=2.54mm, Terminal Position=SINGLE
U4: library part CMP-00024-00006-1, "Motor Driver Power MOSFET Parallel, PWM MultiPowerSO-30", Case/Package="SOP-30 STMicroelectronics", Availability=Unavailable, Component Type=Standard, Design Item ID=VNH5019ATR-E, MF=STMicroelectronics, MP=VNH5019ATR-E, Pins=27, Price=None, SnapEDA_Link=https://www.snapeda.com/parts/VNH5019ATR-E/STMicroelectronics/view-part/423747/?ref=snap, Source=SnapEDAsch.SchLib
"VHN MOTOR CONN": library part CMP-00030-00001-1, "Barrier Strip Terminal Block", RoHS Compliant=Yes

## Free pads (board coordinates)
  round 60 hole 30: 2(50,3850) 3(50,50) 4(3850,50) 5(3850,3850)

## Via types
v1: diameter 50, hole 28, Top Layer to Bottom Layer, 23 vias

## Nets (pads, with @x,y where several pads share a name; then routed paths per layer and width w, separated by ;. In a path a pad name is that pad's centre, name@x,y a point inside that pad or via, vN(x,y) a via of type N, cw(c..) or ccw(c..) an arc to the next point about the centre after c; other vN are vias at no path point)
5.0V: BLUETOOTH.1 C1.1 OPENMV_IRF.3 OPENMV_VNH.2 R1.1 R2.1 U2.3 | length 6882.5
  Top Layer w15: OPENMV_IRF.3 v1(330,540) 405,465 1445,465 ; OPENMV_VNH.2 v1(350,2525) ; v1(545,2885) 548.65,2881.35 842.64,2881.35 R1.1 860.14,2965.41 R2.1 ; U2.3 1655,495 C1.1 1445,465 ; BLUETOOTH.1 3270,155 1535,155 1445,245 1445,465
  Bottom Layer w15: v1(330,540) 330,2495.53 350,2515.53 v1(350,2525) 350,2725 503.3,2878.3 538.3,2878.3 v1(545,2885)
6.0V: C6.1 R9.1 SERVO.2 U3.2 | length 2139.9
  Top Layer w30: SERVO.2 1232.3,1475 1425,1667.7 1425,1755 1500,1830 1610,1830 1695,1745 U3.2 1858.79,1396.21 R9.1
CS: C2.1 OPENMV_VNH.3 R7.2 | length 1031.2
  Top Layer w15: OPENMV_VNH.3 500,2625 695,2430 880.24,2430 R7.2 880.87,2238.19 C2.1
GND: "BATT CONN.2" BLUETOOTH.2 C1.2 C2.2 C3.1 C4.1 C5.2 C6.2 OPENMV_IRF.4 OPENMV_VNH.1 Q2.3 R6.2 R8.2 R10.2 SERVO.3 U1.3 U1.4 U2.2 U4.6 U4.18 U4.19 U4.20 U4.26 U4.27 U4.28
INA: OPENMV_VNH.7 R3.1 | length 609.3
  Top Layer w15: OPENMV_VNH.7 743.58,3025 R3.1
INB: OPENMV_VNH.6 R4.1 | length 661
  Top Layer w15: OPENMV_VNH.6 410,2925 415,2920 420,2920 590,2750 R4.1
NetQ1_1: Q1.1 U4.11 | length 859
  Top Layer w15: Q1.1 1640,2280 1460,2460 1460,2695.1 1502.81,2737.91 U4.11
NetQ2_1: Q2.1 U1.7 | length 195.7
  Top Layer w15: U1.7 1325,3510 Q2.1
NetR1_2: R1.2 U4.9 | length 501.6
  Top Layer w15: R1.2 1266.15,2863.85 1314.02,2815.98 1535.14,2815.98 1535.81,2816.65 U4.9
NetR2_2: R2.2 U4.5 | length 485.4
  Top Layer w15: R2.2 1620.87,2965.85 1629.15,2974.13 U4.5
NetR3_2: R3.2 U4.4 | length 430.1
  Top Layer w15: R3.2 1331.01,3075 1393.13,3012.87 U4.4@1631.06,3012.87
NetR4_2: R4.2 U4.10 | length 426.4
  Top Layer w15: R4.2 1419.36,2750 1446.65,2777.28 U4.10
NetR5_2: R5.2 U4.7 | length 683.4
  Top Layer w15: R5.2 1313.7,2633.7 v1(1315,2635) ; v1(1315,2900) 1315.98,2900.98 1636.06,2900.98 U4.7
  Bottom Layer w15: v1(1315,2635) v1(1315,2900)
NetR7_1: R7.1 R8.1 U4.8 | length 1135.5
  Top Layer w15: R7.1 1189.37,2430.63 1226.54,2393.46 R8.1 1235.71,2315 v1(1465,2315) ; v1(1465,2858.48) 1467.46,2856.02 U4.8
  Bottom Layer w15: v1(1465,2315) v1(1465,2858.48)
NetR9_2: R9.2 R10.1 U3.1 | length 524.4
  Top Layer w15: R10.1 1444.45,1391.33 R9.2 1595,1446.43 U3.1
OUT1: "IRF MOTOR CONN.2" Q2.2 | length 2013.6
  Top Layer w50: Q2.2 2785,3460 2830,3415 3370,3415
OUTA: "VHN MOTOR CONN.1" U4.1 U4.25 U4.30 U4.HS2 | length 3035.2
  Top Layer w30: U4.1 1650.33,3131.61 1773.72,3255 v1(1775,3255) ; v1(2050,3235) 2050,3090 U4.HS2 ; U4.HS2@2120,3033.27 2218.35,3131.61 U4.30 ; 2225,2935 2225.24,2934.76 U4.25
  Top Layer w50: U4.HS2 2120,3175 2155,3210 2560,3210 2690,3080 v1@2690,2925 ; v1(2880,2510) 3342.83,2510 3354.41,2521.57
  Bottom Layer w30: v1(1775,3255) 2030,3255 v1(2050,3235)
  Bottom Layer w50: v1(2690,2915) 2690,2700 v1(2880,2510)
OUTB: "VHN MOTOR CONN.2" U4.15 U4.16 U4.21 U4.HS3 | length 2902.2
  Top Layer w30: U4.15 1641.65,2518.35 v1(1680,2480) ; v1(2045,2480) 2045,2617.05 U4.HS3 2205.24,2777.28 U4.21 ; U4.HS3@2120,2676.28 2215.85,2580.43 U4.16
  Top Layer w50: U4.HS3@2125,2687.05 2125,2475 2225,2375 2550,2375 2895,2720 3352.83,2720 3354.41,2718.43
  Bottom Layer w30: v1(1680,2480) v1(2045,2480)
"PWM DC IRF": OPENMV_IRF.1 U1.2 | length 3169.2
  Top Layer w15: OPENMV_IRF.1 395,740 485,830 v1(485,990)
  Bottom Layer w15: v1(485,990) 490,995 490,2635 715,2860 715,3325 U1.2
"PWM DC VNH": OPENMV_VNH.5 R5.1 R6.1 | length 838.7
  Top Layer w15: OPENMV_VNH.5 410,2825 605,2630 789.76,2630 R5.1 793.46,2571.54 837.76,2527.24 R6.1
"PWM SERVO": OPENMV_IRF.2 OPENMV_VNH.4 SERVO.1 | length 2747.9
  Top Layer w15: OPENMV_IRF.2 207.5,642.5 437.5,642.5 v1(440,645) ; OPENMV_VNH.4 v1(420,2725) ; SERVO.1 210.07,1374.93 v1(405.14,1374.86) v1(405.14,1374.86)
  Bottom Layer w15: v1(420,2725) 416.55,2721.55 416.55,2691.27 405.14,2679.86 v1(405.14,1374.86) 440,1340 v1(440,645)
RX: BLUETOOTH.4 OPENMV_BLUETOOTH.2 | length 2413.1
  Top Layer w15: OPENMV_BLUETOOTH.2 890,320 v1(1060,320) ; v1(2860,230) BLUETOOTH.4
  Bottom Layer w15: v1(1060,320) 1125,320 1345,100 2730,100 v1(2860,230)
TX: BLUETOOTH.3 OPENMV_BLUETOOTH.1 | length 2841.8
  Top Layer w15: OPENMV_BLUETOOTH.1 870,400 v1(1055,400) ; v1(3140,385) 3180,345 3180,265 BLUETOOTH.3
  Bottom Layer w15: v1(1055,400) 1220,400 1420,200 2650,200 2835,385 v1(3140,385)
VBAT: "BATT CONN.1" C4.2 Q1.3 U4.12 | length 3172.7
  Top Layer w30: v1(1520,2695) 1523.06,2698.06 U4.12@1631.06,2698.06
  Top Layer w50: Q1.3 1840,2111.18 1873.82,2145 2030.5,2145 ; v1@2030.5,2384.5 2030.5,2145 ; 3355,1300 3215.5,1300 3005.5,1510 3005.5,1797.13 2901.86,1900.77 2881.36,1900.77 2878.64,1903.48 2477.02,1903.48 2235.5,2145 2030.5,2145
  Bottom Layer w30: v1(1520,2695) 1520,2462.57 1562.57,2420 1994.59,2420 2024.59,2390 v1(2030,2390)
VCC: "IRF MOTOR CONN.1" C3.2 C5.1 Q1.2 U1.6 U2.1 U3.3 U4.3 U4.13 U4.23 U4.HS1 | length 6936.9
  Top Layer w30: U1.6 1270,3340 1270,3192.57 1409.7,3052.87 U4.3 1782.4,3052.87 U4.HS1@1879.84,2955.43 ; U4.13 1782.4,2659.17 U4.HS1@1879.84,2756.61 ; U4.HS1 U4.23
  Top Layer w50: U3.3 1795,1790 1820,1790 ; C3.2 1855,476.53 U2.1 2200,670 2340,810 2340,1495 2220.2,1614.8 C5.1 2022.32,1615.39 1994.61,1615.39 1820,1790 ; U4.HS1@1879.84,2756.61 1879.84,2419.84 1740,2280 Q1.2 1740,1870 1820,1790 ; U4.HS1@1879.84,2955.43 1879.84,3229.84 1965,3315 2609.43,3315 2706.28,3218.15 3370,3218.15
pads on no net: U1.1 U1.5 U1.8 U4.2 U4.14 U4.17 U4.22 U4.24 U4.29

## Polygon pours and split planes (outlines as drawn)
GND on Top Layer "GND_L01_P006" (solid, pour order 6): 0,1975 0,3900 3900,3900 3900,900 3905,895 2620,895 2620,1985 2615,1990 2615,1980
GND on Top Layer "GND_L01_P005" (solid, pour order 5): 0,840 2615,840 2615,1990 3900,1990 3900,0 0,0
GND on Top Layer "GND_L01_P003" (solid, pour order 3): 0,1780 3900,1780 3900,1025 3860,1065 0,1065
GND on Top Layer "GND_L01_P002" (solid, pour order 2): 3905,895 3905,2040 3900,2045 2615,2045 2615,900 2620,895
GND on Bottom Layer "GND_L02_P010" (solid, pour order 10): 0,1975 0,3900 3900,3900 3900,900 3905,895 2620,895 2620,1985 2615,1990 2615,1980
GND on Bottom Layer "GND_L02_P009" (solid, pour order 9): 0,840 2615,840 2615,1990 3900,1990 3900,0 0,0
GND on Bottom Layer "GND_L02_P008" (solid, pour order 8): 0,1780 3900,1780 3900,1025 3860,1065 0,1065
GND on Bottom Layer "GND_L02_P007" (solid, pour order 7): 3905,895 3905,2040 3900,2045 2615,2045 2615,900 2620,895

## Silkscreen, mask and mechanical layers (free items; w line width, h text height)
Top Overlay:
  text "OUT1 (-)" at 3690,3410 h40
  text "VCC (+)" at 3690,3205 h40
  text "INA" at 270,3055 h40
  text "INB" at 270,2945 h40
  text "PWM DC VNH" at 270,2850.11 h40
  text "PWM SERVO" at 270,2765.11 h40
  text "OUTB (-)" at 3675,2715 h40
  text "CS" at 280,2645.11 h40
  text "5.0V" at 275,2555 h40
  text "OUTA (+)" at 3675,2495 h40
  text "GND" at 275,2425 h40
  text "GND" at 45,1565 h40
  text "GND (-)" at 3675,1485 h40
  text "6.0V" at 50,1465 h40
  text "PWM" at 45,1380 h40
  text "SERVO" at 25,1345.43 h40
  text "VBAT (+)" at 3675,1290 h40
  text "PWM" at 290,795 h40
  text "DC IRF" at 275,760.43 h40
  text "PWM" at 290,700 h40
  text "SERVO" at 270,665 h40
  text "5.0V" at 290,575.11 h40
  text "GND" at 285,430.11 h40
  text "RX" at 3020,310 h40
  text "TX" at 3115,310 h40
  text "GND" at 3210,310 h40
  text "5.0V" at 3320,310 h40
  text "TX" at 560,230 h40
  text "RX" at 885,230 h40

## Text inside footprints (layer, text, board x,y; h text height)
C1: Top Overlay "+" at 1485,550 h59.06 r270
C5: Top Overlay "+" at 1995,1735 h59.06 r270
C6: Top Overlay "+" at 1335,1730 h59.06 r270
U1: Top Overlay "*" at 840,3650 h50; Top 3D Body "*" at 892.5,3585 h50